# EAGLE board Sinal (EAGLE 9.7.0)

Size 175.25 x 82.7 mm. Coordinates in mm from the lower left corner, seen from the top.
Outline: 0,0 175.25,0 175.25,82.7 0,82.7 0,0
Copper layers (1*16): Top 0.035mm / dielectric 1.5mm / Bottom 0.035mm
Design rules "default": minimum track width 6mil, minimum drill 0.35mm, track to track 6mil, track to pad 6mil, pad to pad 6mil, via to via 6mil, smd to smd 6mil, copper to edge 40mil, drill to drill 6mil, minimum pad ring 10mil, minimum via ring 8mil, stop-mask expansion 4mil, vias tented up to drill 0mil, thermal gap 10mil

## Footprints (pad centres in the part's own frame; a part is rotated, then mirrored left to right if it is on the bottom)
LEDRD254W60D565H860B = drill 0.981 pad 1.581: 1 -1.27,0; 2 1.27,0
LEDRD254W60D565H860B_O = drill 0.981 pad 1.581: 1 -1.27,0; 2 1.27,0
LEDRD254W60D565H860B_G = drill 0.981 pad 1.581: 1 -1.27,0; 2 1.27,0
PIEZO = drill 1 pad 1.6: 1 -3.5,0; 2 3.5,0
RESAD1016W63L850D250B = drill 0.83 pad 1.43: 1 -5.08,0; 2 5.08,0
SWITCH-MOMENTARY-PTH-6.5MM = drill 1.016 pad 1.88: 1 -3.251,2.261; 2 3.251,2.261; 3 -3.251,-2.261; 4 3.251,-2.261
ARDUINO-UNO-R3-SHIELD = drill 1.016 pad 1.88: 3.3V 24.13,-2.54; 5V 24.13,0; A0 24.13,12.7; A1 24.13,15.24; A2 24.13,17.78; A3 24.13,20.32; A4 24.13,22.86; A5 24.13,25.4; AREF -24.13,-13.97; D2 -24.13,20.32; D3 -24.13,17.78; D4 -24.13,15.24; D5 -24.13,12.7; D6 -24.13,10.16; D7 -24.13,7.62; D8 -24.13,3.81; D9 -24.13,1.27; D10 -24.13,-1.27; D11 -24.13,-3.81; D12 -24.13,-6.35; D13 -24.13,-8.89; GND@0 24.13,2.54; GND@1 24.13,5.08; GND@2 -24.13,-11.43; IOREF 24.13,-7.62; NC 24.13,-10.16; RES 24.13,-5.08; RX -24.13,25.4; SCL -24.13,-19.05; SDA -24.13,-16.51; TX -24.13,22.86; VIN 24.13,7.62

## Placement (x,y rotation side)
D1  RED  [LEDRD254W60D565H860B]  112.38,41.22 180 top
D2  ORANGE  [LEDRD254W60D565H860B_O]  120,41.22 180 top
D3  GREEN  [LEDRD254W60D565H860B_G]  127.62,41.22 180 top
DPEDESTRE  GREEN  [LEDRD254W60D565H860B_G]  153.02,41.22 180 top
DPEDESTRE1  RED  [LEDRD254W60D565H860B]  145.4,41.22 180 top
PIEZOSINAL_QUANDO_P_VERDE  PIEZO  [PIEZO]  160.92,69.12 0 top
RAMARELO  115  [RESAD1016W63L850D250B]  121.27,31.05 90 top
RRESISTOR_BOTÃO  10k  [RESAD1016W63L850D250B]  164.45,48.84 90 top
RVERDE  115  [RESAD1016W63L850D250B]  128.89,31.05 90 top
RVERDE_P  115  [RESAD1016W63L850D250B]  154.29,31.05 90 top
RVERMELHO  165  [RESAD1016W63L850D250B]  113.65,31.05 90 top
RVERMELHO_P  165  [RESAD1016W63L850D250B]  146.67,31.05 90 top
SABRIR_PARA_P_FECHAR_PARA_C  SWITCH_MOMENTARY  [SWITCH-MOMENTARY-PTH-6.5MM]  166.99,29.79 90 top
U1  ARDUINO-UNO-R3-SHIELD  [ARDUINO-UNO-R3-SHIELD]  47.88,29.84 270 top

## Library data of the parts
D1 DPEDESTRE1 = Tinkercad; CATEGORY: Opto-Electronic; SUB-CATEGORY: LED; VALUE: LED_RED
D2 = Tinkercad; CATEGORY: Opto-Electronic; SUB-CATEGORY: LED; VALUE: LED_ORANGE
D3 DPEDESTRE = Tinkercad; CATEGORY: Opto-Electronic; SUB-CATEGORY: LED; VALUE: LED_GREEN
PIEZOSINAL_QUANDO_P_VERDE RAMARELO RRESISTOR_BOTÃO RVERDE RVERDE_P RVERMELHO RVERMELHO_P SABRIR_PARA_P_FECHAR_PARA_C U1 = Tinkercad

## Nets
D1_A: D1.1 RVERMELHO.2
D2_A: D2.1 RAMARELO.2
D3_A: D3.1 RVERDE.2
DPEDESTRE1_A: DPEDESTRE1.1 RVERMELHO_P.2
DPEDESTRE_A: DPEDESTRE.1 PIEZOSINAL_QUANDO_P_VERDE.1 RVERDE_P.2
U1_5V: SABRIR_PARA_P_FECHAR_PARA_C.3 SABRIR_PARA_P_FECHAR_PARA_C.4 U1.5V
U1_D2: RVERDE.1 U1.D2
U1_D3: RAMARELO.1 U1.D3
U1_D4: RVERMELHO.1 U1.D4
U1_D6: RVERMELHO_P.1 U1.D6
U1_D7: RVERDE_P.1 U1.D7
U1_D11: RRESISTOR_BOTÃO.1 SABRIR_PARA_P_FECHAR_PARA_C.1 SABRIR_PARA_P_FECHAR_PARA_C.2 U1.D11
U1_GND: D1.2 D2.2 D3.2 DPEDESTRE1.2 DPEDESTRE.2 PIEZOSINAL_QUANDO_P_VERDE.2 RRESISTOR_BOTÃO.2 U1.GND@0 U1.GND@1 U1.GND@2

## Tracks (layer width: path | path; a pad name or v marks a point on that pad's centre or on a via)
D1_A  (1 unrouted)
D2_A  (1 unrouted)
D3_A  (1 unrouted)
DPEDESTRE1_A  (1 unrouted)
DPEDESTRE_A  (2 unrouted)
U1_5V  (2 unrouted)
U1_D2  (1 unrouted)
U1_D3  (1 unrouted)
U1_D4  (1 unrouted)
U1_D6  (1 unrouted)
U1_D7  (1 unrouted)
U1_D11  (3 unrouted)
U1_GND  (9 unrouted)